# EAGLE board LayerOne_2016 (EAGLE 7.5.0)
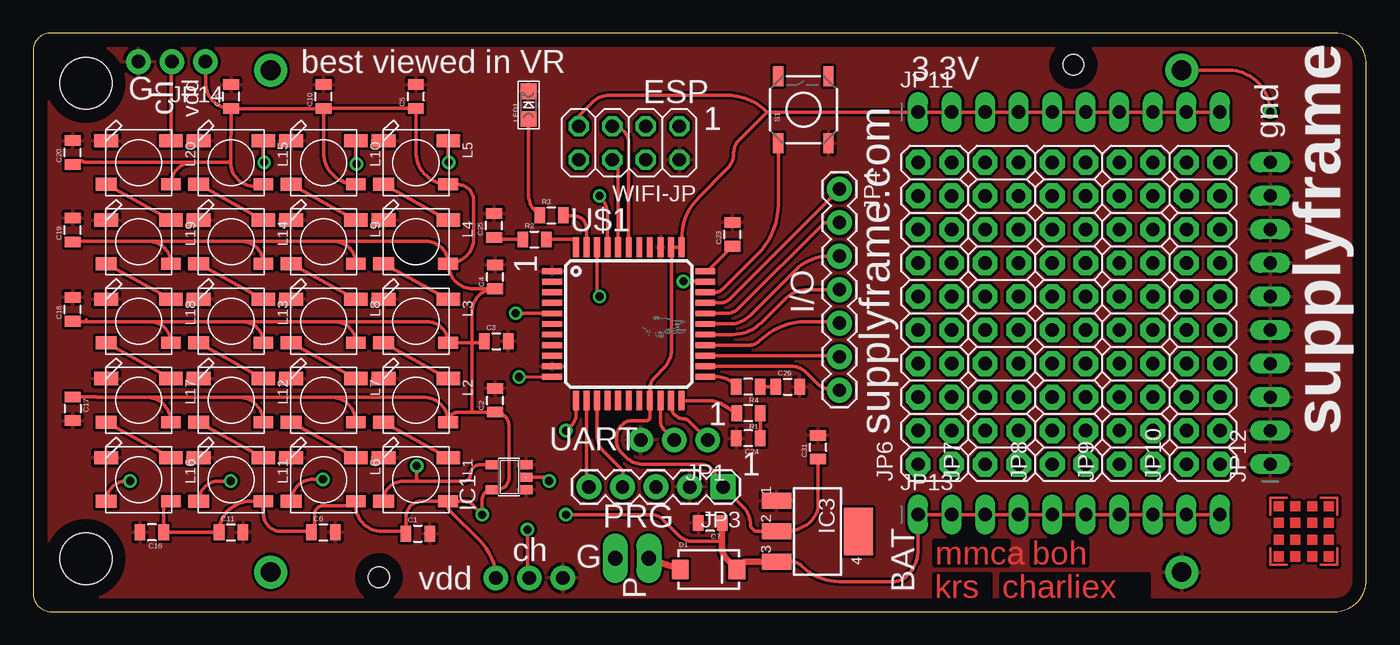
[diagram p0: board, top side]
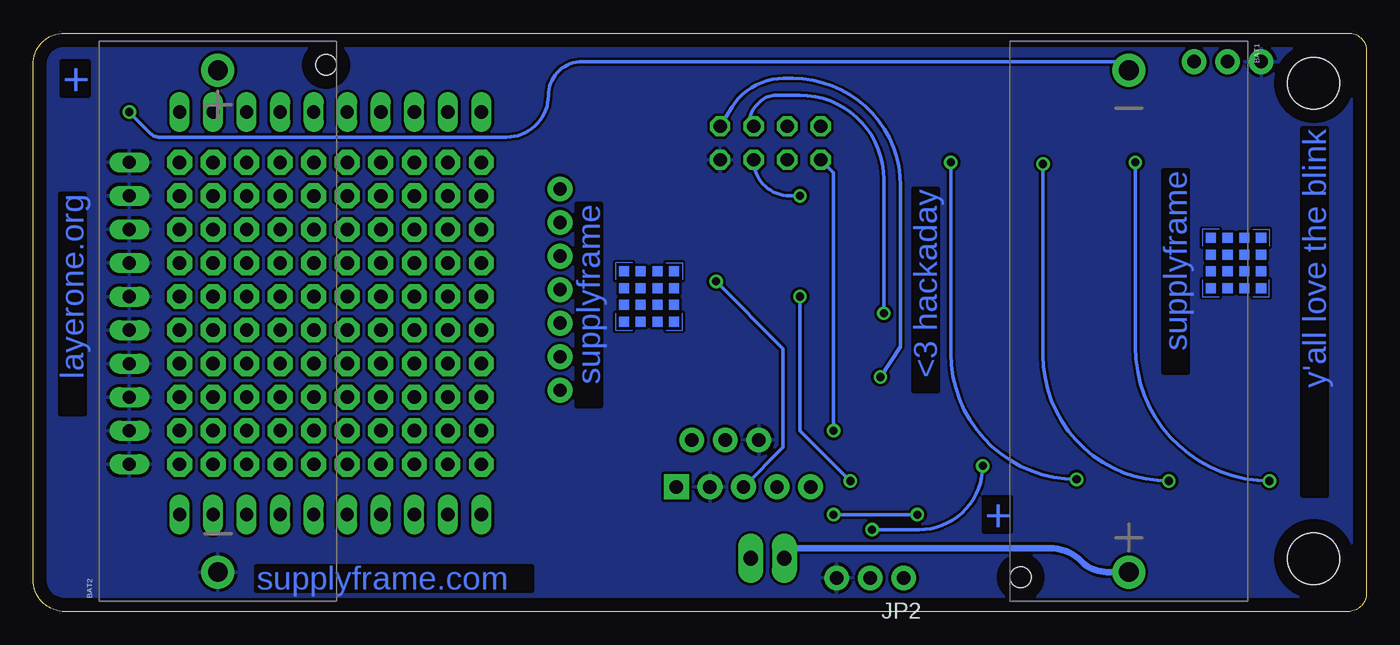
[diagram p1: board, bottom side, seen from below]

Size 101 x 43.81 mm. Coordinates in mm from the lower left corner, seen from the top.
Outline: 1.41,0 98.57,0 arc90 101,2.43 101,41.42 arc90 98.61,43.81 1.34,43.81 arc90 0,42.47 0,1.41 arc90 1.41,0
Copper layers (1*16): Top 0.035mm / dielectric 1.5mm / none 0.035mm
Design rules "default": minimum track width 10mil, minimum drill 24mil, track to track 8mil, track to pad 8mil, pad to pad 8mil, via to via 8mil, smd to smd 8mil, copper to edge 40mil, drill to drill 8mil, minimum pad ring 10mil, minimum via ring 8mil, stop-mask expansion 4mil, vias tented up to drill 0mil, thermal gap 10mil
Net classes: 0 default: width 0.203 mm
Holes 3.94 mm at 4,40 4,4

## Footprints (pad centres in the part's own frame; a part is rotated, then mirrored left to right if it is on the bottom)
TVBGONE-ADJ_BATTERY_CR123A = drill 1.5 pad 2.5: + 19,0; - -19,0 | hole 1.575: 19.4,-8.2
0805 = smd 0.8 x 1.2: 1 -0.9,0; 2 0.9,0
SMA-DIODE = smd 1.27 x 1.47: A -2.15,0; C 2.15,0
SOT23-5 = smd 0.69 x 0.99: 1 -0.95,-1.29; 2 0,-1.29; 3 0.95,-1.29; 4 0.95,1.3; 5 -0.95,1.3
SOT223 = smd 1.219 x 2.235: 1 -2.311,-3.099; 2 0,-3.099; 3 2.311,-3.099 | smd 3.6 x 2.2: 4 0,3.099
1X03_NO_SILK = drill 1.016 pad 1.88: 1 0,0; 2 2.54,0; 3 5.08,0
1X05 = drill 1.016 pad 1.88 square: 1 0,0 | drill 1.016 pad 1.88: 2 2.54,0; 3 5.08,0; 4 7.62,0; 5 10.16,0
1X07 = drill 1.016 pad 1.88: 1 0,0; 2 2.54,0; 3 5.08,0; 4 7.62,0; 5 10.16,0; 6 12.7,0; 7 15.24,0
1X02_LONGPADS = drill 1.118 pad 1.88 long: 1 0,0; 2 2.54,0
2X10 = drill 1.016 pad 1.88 octagon: 1 -11.43,-1.27; 2 -11.43,1.27; 3 -8.89,-1.27; 4 -8.89,1.27; 5 -6.35,-1.27; 6 -6.35,1.27; 7 -3.81,-1.27; 8 -3.81,1.27; 9 -1.27,-1.27; 10 -1.27,1.27; 11 1.27,-1.27; 12 1.27,1.27; 13 3.81,-1.27; 14 3.81,1.27; 15 6.35,-1.27; 16 6.35,1.27; 17 8.89,-1.27; 18 8.89,1.27; 19 11.43,-1.27; 20 11.43,1.27
1X10_OVAL = drill 1 long: 1 -11.43,0; 2 -8.89,0; 3 -6.35,0; 4 -3.81,0; 5 -1.27,0; 6 1.27,0; 7 3.81,0; 8 6.35,0; 9 8.89,0; 10 11.43,0
WS2812B = smd 0.9 x 1.5: 1-VDD 1.65,2.45 | smd 1 x 1.8: 2-DOUT -1.65,2.45; 3-GND -1.65,-2.45 | smd 1 x 1.6: 4-DIN 1.65,-2.45
CHIPLED_0805 = smd 1.2 x 1.2: A 0,-1.05; C 0,1.05
SPARKFUN_TACTILE_SWITCH_SMD = smd 1.524 x 0.762: 1 -2.54,1.905; 2 2.54,1.905; 3 -2.54,-1.905; 4 2.54,-1.905
TQFP44 = smd 1.5 x 0.44: 1 -5.8,4; 2 -5.8,3.2; 3 -5.8,2.4; 4 -5.8,1.6; 5 -5.8,0.8; 6 -5.8,0; 7 -5.8,-0.8; 8 -5.8,-1.6; 9 -5.8,-2.4; 10 -5.8,-3.2; 11 -5.8,-4; 23 5.8,-4; 24 5.8,-3.2; 25 5.8,-2.4; 26 5.8,-1.6; 27 5.8,-0.8; 28 5.8,0; 29 5.8,0.8; 30 5.8,1.6; 31 5.8,2.4; 32 5.8,3.2; 33 5.8,4 | smd 0.44 x 1.5: 12 -4,-5.8; 13 -3.2,-5.8; 14 -2.4,-5.8; 15 -1.6,-5.8; 16 -0.8,-5.8; 17 0,-5.8; 18 0.8,-5.8; 19 1.6,-5.8; 20 2.4,-5.8; 21 3.2,-5.8; 22 4,-5.8; 34 4,5.8; 35 3.2,5.8; 36 2.4,5.8; 37 1.6,5.8; 38 0.8,5.8; 39 0,5.8; 40 -0.8,5.8; 41 -1.6,5.8; 42 -2.4,5.8; 43 -3.2,5.8; 44 -4,5.8
2X04 = drill 1.016 octagon: 1 -3.81,-1.27; 2 -3.81,1.27; 3 -1.27,-1.27; 4 -1.27,1.27; 5 1.27,-1.27; 6 1.27,1.27; 7 3.81,-1.27; 8 3.81,1.27

## Placement (x,y rotation side)
BAT1  CR123A  [TVBGONE-ADJ_BATTERY_CR123A]  18,22 270 bottom
BAT2  CR123A  [TVBGONE-ADJ_BATTERY_CR123A]  87,22 90 bottom
C1  [0805]  29.15,5.91 0 top
C2  [0805]  35,16 90 top
C3  [0805]  35.1,20.47 0 top
C4  [0805]  35,25.35 90 top
C5  [0805]  29,39 90 top
C6  [0805]  22,6 0 top
C7  100uF  [0805]  51.29,6.71 180 top
C10  [0805]  22,39 90 top
C11  [0805]  15,6 0 top
C15  [0805]  15,39 90 top
C16  [0805]  9,6 180 top
C17  [0805]  3,15.37 270 top
C18  [0805]  3,22.89 90 top
C19  [0805]  3,28.89 90 top
C20  [0805]  3,34.76 90 top
C23  1.0uF  [0805]  52.97,28.57 90 top
C24  2200pF  [0805]  54.18,13.13 180 top
C25  1.0uF  [0805]  34.91,29.23 90 top
C26  10000pF  [0805]  57.17,17.03 0 top
C31  10uF  [0805]  59.46,12.45 90 top
D1  [SMA-DIODE]  51.18,3.2 0 top
IC1  M74VHC1GT125DF2G  [SOT23-5]  36.07,10.18 90 top
IC3  [SOT223]  59.42,6.08 270 top
JP1  [1X03_NO_SILK]  51.11,13 180 top
JP2  [1X03_NO_SILK]  35.05,2.55 180 bottom
JP3  [1X05]  52.27,9.44 180 top
JP4  [1X07]  61.08,32 270 top
JP5  M02PTH3  [1X02_LONGPADS]  46.64,4.04 180 top
JP6  [2X10]  68.31,22.59 90 top
JP7  [2X10]  73.39,22.59 90 top
JP8  [2X10]  78.47,22.59 90 top
JP9  [2X10]  83.55,22.59 90 top
JP10  [2X10]  88.63,22.59 90 top
JP11  [1X10_OVAL]  78.47,37.83 0 top
JP12  [1X10_OVAL]  93.71,22.59 90 top
JP13  [1X10_OVAL]  78.47,7.35 0 top
JP14  [1X03_NO_SILK]  13.06,41.64 180 top
L1  WS2812B  [WS2812B]  29,10 270 top
L2  WS2812B  [WS2812B]  29,16 270 top
L3  WS2812B  [WS2812B]  29,22 270 top
L4  WS2812B  [WS2812B]  29,28 270 top
L5  WS2812B  [WS2812B]  29,34 270 top
L6  WS2812B  [WS2812B]  22,10 270 top
L7  WS2812B  [WS2812B]  22,16 270 top
L8  WS2812B  [WS2812B]  22,22 270 top
L9  WS2812B  [WS2812B]  22,28 270 top
L10  WS2812B  [WS2812B]  22,34 270 top
L11  WS2812B  [WS2812B]  15,10 270 top
L12  WS2812B  [WS2812B]  15,16 270 top
L13  WS2812B  [WS2812B]  15,22 270 top
L14  WS2812B  [WS2812B]  15,28 270 top
L15  WS2812B  [WS2812B]  15,34 270 top
L16  WS2812B  [WS2812B]  8,10 270 top
L17  WS2812B  [WS2812B]  8,16 270 top
L18  WS2812B  [WS2812B]  8,22 270 top
L19  WS2812B  [WS2812B]  8,28 270 top
L20  WS2812B  [WS2812B]  8,34 270 top
LED1  [CHIPLED_0805]  37.54,38.35 0 top
R1  0R  [0805]  54.19,15.03 180 top
R2  0R  [0805]  37.98,28.18 0 top
R3  560R  [0805]  39.27,30 0 top
R4  0R  [0805]  54.17,17.03 180 top
S1  [SPARKFUN_TACTILE_SWITCH_SMD]  58.35,38 90 top
U$1  CY8C4245  [TQFP44]  45.12,21.78 0 top
WIFI-JP  [2X04]  45.14,35.48 180 top

## Library data of the parts
BAT1 BAT2 = tvbgone-2layer
C1-C6 C10 C11 C15-C20 = SparkFun-Passives
C7 C23-C26 C31 = SparkFun-Capacitors
D1 = SparkFun-DiscreteSemi
IC1 = 74xx-little-de; DIGIKEY-ND: M74VHC1GT125DF1GOSCT-ND; MOUSER: 863-M74VHC1GT125DF2G; PARTNO: M74VHC1GT125DF2G
IC3 = v-reg-3
JP1-JP3 JP5-JP10 JP14 = SparkFun-Connectors
JP4 = SparkFun
JP11-JP13 LED1 = microbuilder
L1-L20 = adafruit
R1-R4 = SparkFun-Resistors
S1 = Nullspace
U$1 = cypress
WIFI-JP = pinhead

## Nets
3.3V: C31.1 IC3.2 JP3.1 JP11.1 JP11.2 JP11.3 JP11.4 JP11.5 JP11.6 JP11.7 JP11.8 JP11.9 JP11.10 U$1.19 U$1.34 U$1.35 WIFI-JP.7
!XRES: JP3.3 U$1.32
BATTERY6V: D1.A JP5.1
CH_PD: U$1.5 WIFI-JP.3
DIN: IC1.4 JP2.2 L1.4-DIN
GND: BAT2.- C1.2 C2.2 C3.2 C4.2 C5.2 C6.2 C7.2 C10.2 C11.2 C15.2 C16.2 C17.2 C18.2 C19.2 C20.2 C23.2 C24.2 C25.2 C26.2 C31.2 IC1.1 IC1.3 IC3.1 JP1.3 JP2.3 JP3.2 JP12.1 JP12.2 JP12.3 JP12.4 JP12.5 JP12.6 JP12.7 JP12.8 JP12.9 JP12.10 JP14.3 L1.3-GND L2.3-GND L3.3-GND L4.3-GND L5.3-GND L6.3-GND L7.3-GND L8.3-GND L9.3-GND L10.3-GND L11.3-GND L12.3-GND L13.3-GND L14.3-GND L15.3-GND L16.3-GND L17.3-GND L18.3-GND L19.3-GND L20.3-GND LED1.C S1.3 U$1.1 U$1.10 U$1.36 WIFI-JP.2
GPIO0_3V: U$1.40 WIFI-JP.6
GPIO2_3V: U$1.41 WIFI-JP.4
N$1: L1.2-DOUT L2.4-DIN
N$2: L3.2-DOUT L4.4-DIN
N$3: L4.2-DOUT L5.4-DIN
N$4: L5.2-DOUT L6.4-DIN
N$5: L6.2-DOUT L7.4-DIN
N$6: L7.2-DOUT L8.4-DIN
N$7: L8.2-DOUT L9.4-DIN
N$8: L9.2-DOUT L10.4-DIN
N$9: L11.2-DOUT L12.4-DIN
N$10: L12.2-DOUT L13.4-DIN
N$11: L13.2-DOUT L14.4-DIN
N$12: L14.2-DOUT L15.4-DIN
N$13: L15.2-DOUT L16.4-DIN
N$14: L16.2-DOUT L17.4-DIN
N$15: L17.2-DOUT L18.4-DIN
N$16: L18.2-DOUT L19.4-DIN
N$17: L19.2-DOUT L20.4-DIN
N$20: C24.1 R1.1
N$21: C25.1 R2.1
N$22: C26.1 R4.1
N$23: LED1.A R3.1
N$25: L10.2-DOUT L11.4-DIN
N$26: JP14.2 L20.2-DOUT
N$27: L2.2-DOUT L3.4-DIN
N$28: BAT1.- BAT2.+
N$29: JP4.7 U$1.24
N$30: JP4.6 U$1.25
N$31: JP4.5 U$1.26
N$32: JP4.4 U$1.27
N$33: JP4.3 U$1.28
N$34: JP4.2 U$1.29
N$35: JP4.1 U$1.30
N$36: BAT1.+ JP5.2
P0_7: S1.1 U$1.31
P1_5_3V: IC1.2 U$1.42
P1_6: R3.2 U$1.43
P1_7: R2.2 U$1.44
P3_3: JP3.4 U$1.14
P4_0: JP1.2 U$1.20
P4_1: JP1.1 U$1.21
P4_2: R1.2 U$1.22
P4_3: R4.2 U$1.23
RST_3V: U$1.39 WIFI-JP.5
RX: U$1.12 WIFI-JP.8
SWDIO: JP3.5 U$1.13
TX: U$1.11 WIFI-JP.1
VCC: C1.1 C2.1 C3.1 C4.1 C5.1 C6.1 C7.1 C10.1 C11.1 C15.1 C16.1 C17.1 C18.1 C19.1 C20.1 D1.C IC1.5 IC3.3 JP2.1 JP13.1 JP13.2 JP13.3 JP13.4 JP13.5 JP13.6 JP13.7 JP13.8 JP13.9 JP13.10 JP14.1 L1.1-VDD L2.1-VDD L3.1-VDD L4.1-VDD L5.1-VDD L6.1-VDD L7.1-VDD L8.1-VDD L9.1-VDD L10.1-VDD L11.1-VDD L12.1-VDD L13.1-VDD L14.1-VDD L15.1-VDD L16.1-VDD L17.1-VDD L18.1-VDD L19.1-VDD L20.1-VDD
VCCD: C23.1 U$1.33

## Tracks (layer width: path | path; a pad name or v marks a point on that pad's centre or on a via)
3.3V
  Top 0.254: 55.61,37.83 53.44,35.66 arc45 53.07,34.76 arc-45 52.54,33.49 50.47,31.42 arc45 49.12,28.16 U$1.34 U$1.35 48.37,27.53 48.37,19.84 arc-45 47.8,18.47 47.09,17.76 arc45 46.72,16.85 U$1.19 46.72,14.72 arc-90 46.47,14.46 45.32,14.46 arc45 44.67,14.19 44.55,14.07 arc45 44.18,13.17 44.18,12.96 arc45 44.55,12.06 44.92,11.69 arc45 46.19,11.16 50.55,11.16 arc-90 51.8,9.91 JP3.1 53.81,7.91 arc-45 54.34,6.62 arc90 54.88,6.08 IC3.2 56.97,6.08 arc45 58.98,6.91 arc45 59.46,8.07 C31.1 | 55.61,37.83 JP11.1 JP11.2 JP11.3 JP11.4 JP11.5 JP11.6 JP11.7 JP11.8 JP11.9 JP11.10 | WIFI-JP.7 41.33,37.52 42.38,38.57 arc-45 43.65,39.1 52.54,39.1 arc-45 55.61,37.83
!XRES  (via drill 0.61)
  Top 0.254: v49.26,25 50.9,25 U$1.32
  none 0.254: JP3.3 47.17,9.44 44.18,12.43 44.18,19.92 v49.26,25
BATTERY6V
  Top 0.254: 46.72,3.96 JP5.1
  Top 0.508: D1.A 46.72,3.96
CH_PD  (via drill 0.61)
  Top 0.254: U$1.5 v36.57,22.58 v36.56,22.59
  none 0.254: v36.56,22.59 36.56,32.75 arc-90 42.91,39.1 44.71,39.1 arc-45 45.98,38.57 46.17,38.38 arc-45 46.72,37.06 WIFI-JP.3
DIN  (via drill 0.61)
  Top 0.254: L1.4-DIN 26.53,8.37 arc-90 28.01,9.86 29.19,9.86 | 29.19,9.86 32.59,9.86 arc90 33.13,10.4 arc-90 33.86,11.13 IC1.4 | JP2.2 arc-90 37.45,2.69 v37.45,6.21 | v29.07,11.03 29.07,9.99 arc90 29.19,9.86
  none 0.254: v37.45,6.21 33.89,6.21 arc-90 v29.07,11.03
GND
  Top 0.254: IC3.1 56.32,8.89
  pour Top: 101,43 1,43 1,1 101,1
  pour none: 101.33,44.18 -0.27,44.18 -0.27,-0.27 101.33,-0.27
GPIO0_3V
  Top 0.254: U$1.40 44.32,33.77 arc90 WIFI-JP.6
GPIO2_3V  (via drill 0.61)
  Top 0.254: U$1.41 43.52,30.01 arc45 v42.91,31.48
  none 0.254: v42.91,31.48 43.68,31.48 arc90 WIFI-JP.4
N$1
  Top 0.254: L2.4-DIN L1.2-DOUT
N$2
  Top 0.254: L3.2-DOUT L4.4-DIN
N$3
  Top 0.254: L5.4-DIN L4.2-DOUT
N$4  (via drill 0.61)
  Top 0.254: L6.4-DIN arc-90 21.22,10.02 v21.95,10.02 | v31.48,34.02 arc-90 31.45,34.05 L5.2-DOUT
  none 0.254: v21.95,10.02 arc90 31.48,19.54 v31.48,34.02
N$5
  Top 0.254: L6.2-DOUT L7.4-DIN
N$6
  Top 0.254: L8.4-DIN L7.2-DOUT
N$7
  Top 0.254: L9.4-DIN L8.2-DOUT
N$8
  Top 0.254: L10.4-DIN L9.2-DOUT
N$9
  Top 0.254: L12.4-DIN L11.2-DOUT
N$10
  Top 0.254: L13.4-DIN L12.2-DOUT
N$11
  Top 0.254: L14.4-DIN L13.2-DOUT
N$12
  Top 0.254: L15.4-DIN L14.2-DOUT
N$13  (via drill 0.61)
  Top 0.254: L16.4-DIN arc-90 7.09,9.89 v7.35,9.89 | v17.51,34.02 arc-90 17.45,34.08 L15.2-DOUT
  none 0.254: v7.35,9.89 arc90 17.51,20.05 v17.51,34.02
N$14
  Top 0.254: L17.4-DIN L16.2-DOUT
N$15
  Top 0.254: L18.4-DIN L17.2-DOUT
N$16
  Top 0.254: L19.4-DIN L18.2-DOUT
N$17
  Top 0.254: L20.4-DIN L19.2-DOUT
N$18
  none 0.025: 8.62,28.94 7.35,28.94 7.35,27.67
N$19
  none 0.025: 11.16,28.94 12.43,28.94 12.43,27.67
N$20
  Top 0.254: R1.1 C24.1
N$21
  Top 0.254: R2.1 35.06,28.18 arc-90 C25.1
N$22
  Top 0.254: C26.1 R4.1
N$23
  Top 0.254: 38.49,30 R3.1 38.03,30.34 arc-45 37.54,31.53 LED1.A
N$24
  none 0.025: 12.43,25.13 12.43,23.86 11.16,23.86
N$25  (via drill 0.61)
  Top 0.254: L11.4-DIN arc-90 14.09,9.89 v14.97,9.89 | v24.5,33.89 arc-90 24.45,33.94 L10.2-DOUT
  none 0.254: v14.97,9.89 arc90 24.5,19.41 v24.5,33.89
N$26
  Top 0.254: L20.2-DOUT 10.45,41.56 JP14.2
N$27
  Top 0.254: L3.4-DIN L2.2-DOUT
N$28  (via drill 0.61)
  Top 0.254: BAT2.+ 90.54,41 arc-90 v93.71,37.83
  none 0.254: v93.71,37.83 92.07,36.19 arc-45 91.43,35.92 65.14,35.92 arc-90 61.96,39.1 arc90 59.42,41.64 18.64,41.64 arc90 BAT1.-
N$29
  Top 0.254: U$1.24 57.42,18.58 arc-45 58.57,18.11 59.48,17.2 arc45 60.25,16.88 60.97,16.88 JP4.7
N$30
  Top 0.254: U$1.25 61,19.38 JP4.6
N$31
  Top 0.254: U$1.26 54.23,20.18 arc45 55.08,20.53 arc-45 58.51,21.95 60.97,21.95 JP4.5
N$32
  Top 0.254: U$1.27 52.96,20.98 arc45 55.17,21.89 56.91,23.63 arc-45 58.68,24.37 61.07,24.37 JP4.4
N$33
  Top 0.254: U$1.28 52.76,21.78 arc45 54.29,22.41 57.73,25.86 arc-45 60.27,26.91 61.07,26.91 JP4.3
N$34
  Top 0.254: U$1.29 52.53,22.58 arc45 53.44,22.95 59.94,29.46 JP4.2
N$35
  Top 0.254: U$1.30 52.12,23.38 arc45 52.7,23.62 JP4.1
N$36
  none 0.508: BAT1.+ 19.66,3 arc45 21.57,3.79 arc-45 24.03,4.81 43.33,4.81 JP5.2
N$37
  none 0.025: 8.62,23.86 7.35,23.86 7.35,25.13
N$38
  none 0.025: 53.07,26.4 51.8,26.4 51.8,25.13
N$39
  none 0.025: 55.61,26.4 56.88,26.4 56.88,25.13
N$40
  none 0.025: 56.88,22.59 56.88,21.32 55.61,21.32
N$41
  none 0.025: 53.07,21.32 51.8,21.32 51.8,22.59
N$46
  Top 0.203: 97.52,8.62 98.79,8.62 98.79,7.35
N$47
  Top 0.203: 94.98,8.62 93.71,8.62 93.71,7.35
N$48
  Top 0.203: 93.71,4.81 93.71,3.54 94.98,3.54
N$49
  Top 0.203: 97.52,3.54 98.79,3.54 98.79,4.81
P0_7
  Top 0.254: S1.1 56.45,30.84 arc-45 54.89,27.07 52.28,24.46 arc-45 51.59,24.18 U$1.31
P1_5_3V  (via drill 0.61)
  Top 0.254: U$1.42 42.72,24.05 v42.91,23.86 | IC1.2 38.81,10.18 arc-90 v39.1,9.89
  none 0.254: v42.91,23.86 42.91,13.7 v39.1,9.89
P1_6
  Top 0.254: U$1.43 41.92,29.04 arc90 41.01,29.96 40.21,29.96 arc-90 R3.2
P1_7
  Top 0.254: U$1.44 41.12,28.18 R2.2
P3_3
  Top 0.254: U$1.14 42.72,13.37 arc45 43.25,12.09 44.69,10.65 44.69,9.48 JP3.4
P4_0
  Top 0.254: U$1.20 47.52,14.48 arc45 47.82,13.75 JP1.2
P4_1
  Top 0.254: U$1.21 48.32,15.6 arc90 49.33,14.59 arc-45 49.65,14.46 JP1.1
P4_2
  Top 0.254: U$1.22 51.27,15.98 arc-31 52.07,15.76 R1.2
P4_3
  Top 0.254: U$1.23 51.82,17.78 arc-45 53.02,17.28 R4.2
RST_3V
  Top 0.254: U$1.39 45.12,35.51 arc90 WIFI-JP.5
RX  (via drill 0.61)
  Top 0.254: U$1.12 41.12,14.83 arc-45 40.85,14.18 v40.37,13.7
  none 0.254: v40.37,13.7 40.37,33.25 WIFI-JP.8
SWDIO
  Top 0.254: U$1.13 41.92,9.63 JP3.5
TX  (via drill 0.61)
  Top 0.254: v36.81,17.76 U$1.11
  none 0.254: WIFI-JP.1 48.06,38.2 arc58 44.17,40.37 43.42,40.37 arc90 35.29,32.24 35.29,20.05 v36.81,17.76
VCC  (via drill 0.61)
  Top 0.254: L1.1-VDD 31.45,7.93 arc45 31.57,7.64 33.9,5.31 arc-45 35.04,2.57 JP2.1 | JP13.10 JP13.9 JP13.8 JP13.7 JP13.6 JP13.5 JP13.4 JP13.3 JP13.2 JP13.1 67.04,4.72 arc-45 66.21,2.71 arc-45 65.15,2.27 61.08,2.27 arc-45 58.24,3.45 arc45 57.47,3.77 IC3.3 | 31.51,8.29 L1.1-VDD | L1.1-VDD 31.43,8.37 29.48,8.37 arc90 28.25,7.14 C1.1 arc90 28.07,6.08 26.4,6.08 arc-90 24.45,8.03 | 53.9,3.77 D1.C | 52.19,5.18 52.05,5.32 49.96,5.32 arc-45 48.98,5.72 47.77,6.93 arc45 46.77,7.35 v40.37,7.35 | L1.1-VDD 33.02,8.35 v34.02,7.35 34.02,8.48 arc-90 IC1.5 35.14,9.23 arc90 36.05,10.14 36.05,14.05 arc90 C2.1 | C2.1 32.2,15.1 arc90 L2.1-VDD arc90 29.56,16.24 22.56,16.24 | L6.1-VDD 24.45,8.03 | 24.45,8.03 22,8.03 arc90 21.32,7.35 21.32,6.22 arc-90 C6.1 arc90 21.02,6.08 18.78,6.08 arc-90 17.45,7.41 L11.1-VDD 16.45,8.35 arc90 C11.1 C16.1 9.9,7.8 arc-90 L16.1-VDD | 33.26,20.35 L3.1-VDD arc90 29.84,21.95 22.84,21.95 | 33.26,20.35 34.08,20.35 arc90 C3.1 | C2.1 33.26,15.1 33.26,20.35 | 33.26,20.35 33.26,22.71 arc-90 C4.1 33.35,24.45 arc-90 L4.1-VDD | C15.1 14.97,34.02 | 14.97,34.02 arc113 L15.1-VDD | 22,38.04 C10.1 C5.1 29,34.8 arc90 L5.1-VDD 32.13,32.35 arc-90 33.38,31.1 33.38,28.29 arc-90 L4.1-VDD | L10.1-VDD arc-90 22,34.8 22,38.04 | 22,38.04 21.95,38.08 15.02,38.08 C15.1 | L20.1-VDD arc-90 12.12,34.02 | 12.12,34.02 14.97,34.02 | C20.1 arc-90 3.92,34.02 12.12,34.02 | L17.1-VDD arc90 8.56,16.24 | 8.56,16.24 4.81,16.24 arc90 4.79,16.27 C17.1 | L18.1-VDD arc90 8.84,21.95 | 8.84,21.95 3.92,21.95 | 3.92,21.95 3.03,21.95 arc-90 C18.1 | L19.1-VDD arc90 8.75,28.05 | C19.1 arc-90 3.06,28.05 8.75,28.05 | 4.05,22.08 arc-90 3.92,21.95
  Top 0.254: 8.75,28.05 15.75,28.05 | 15.75,28.05 arc-90 L14.1-VDD | 15.75,28.05 22.75,28.05 | 22.75,28.05 arc-90 L9.1-VDD | 22.75,28.05 29.75,28.05 arc-90 L4.1-VDD | L13.1-VDD arc90 15.85,21.95 | 15.85,21.95 8.84,21.95 | L8.1-VDD arc90 22.84,21.95 | 22.84,21.95 15.85,21.95 | L12.1-VDD arc90 15.56,16.24 | 15.56,16.24 8.56,16.24 | L7.1-VDD arc90 22.56,16.24 | 22.56,16.24 15.56,16.24 | C15.1 arc-90 13.06,40.03 JP14.1
  Top 0.508: IC3.3 53.9,3.77 | C7.1 52.19,5.18 52.19,4.75 arc45 52.48,4.04 D1.C
  none 0.254: v40.37,7.35 v34.02,7.35
VCCD
  Top 0.254: U$1.33 51.09,25.78 C23.1
(copper drawn outside any net)
  shapes: Top area x16, none area x32

## Text on the board
Top: mmca | boh | krs | charliex
none: + | y'all love the blink | supplyframe | <3 hackaday | layerone.org | supplyframe | + | supplyframe.com
_tsilk: supplyframe | best viewed in VR | 3.3V | G | ch | ESP | supplyframe.com | vdd | 1 | gnd | 1 | I/O | 1 | UART | 1 | PRG | ch | G | vdd | BAT | P